# Altium PCB PRO_PCB_DESIGN.PcbDoc
Units mm, origin at the board's own origin, x right, y up, seen from the top; angles counter-clockwise.
Board outline 20 x 20 mm, 2 copper layers (Top Layer, Bottom Layer), stack 1.671 mm thick; 4 components, 3 nets, 10 pads, 2 vias.
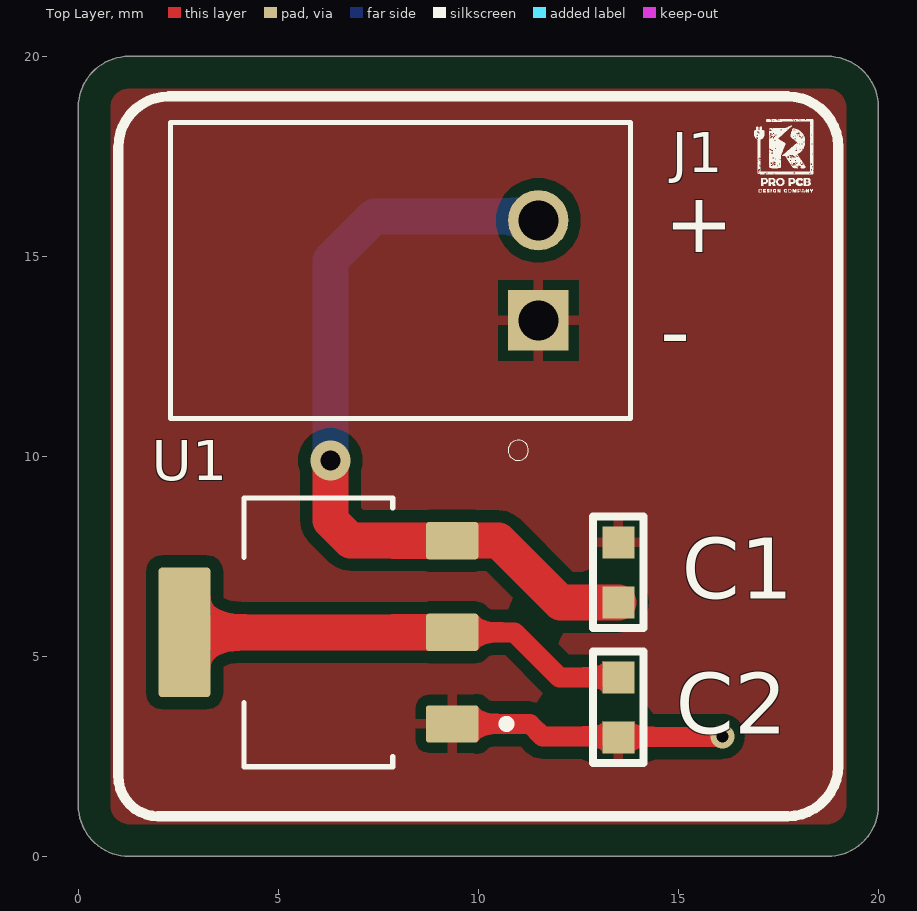
[diagram p0: Top Layer view]
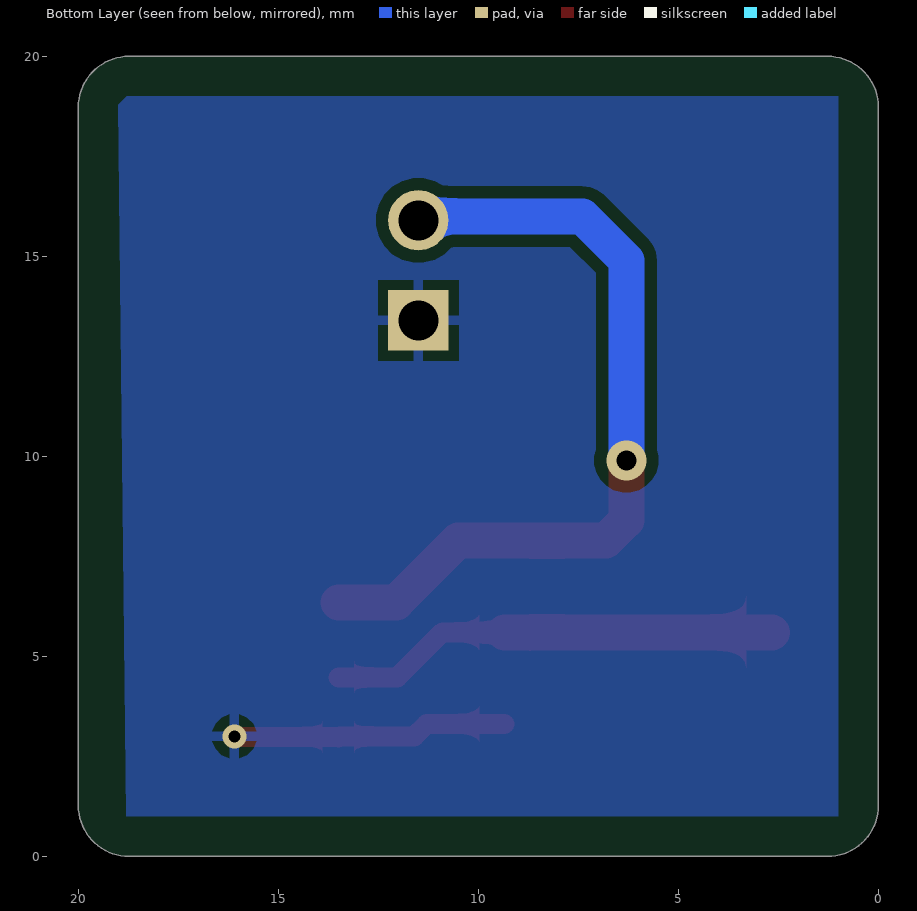
[diagram p1: Bottom Layer view, seen from below]
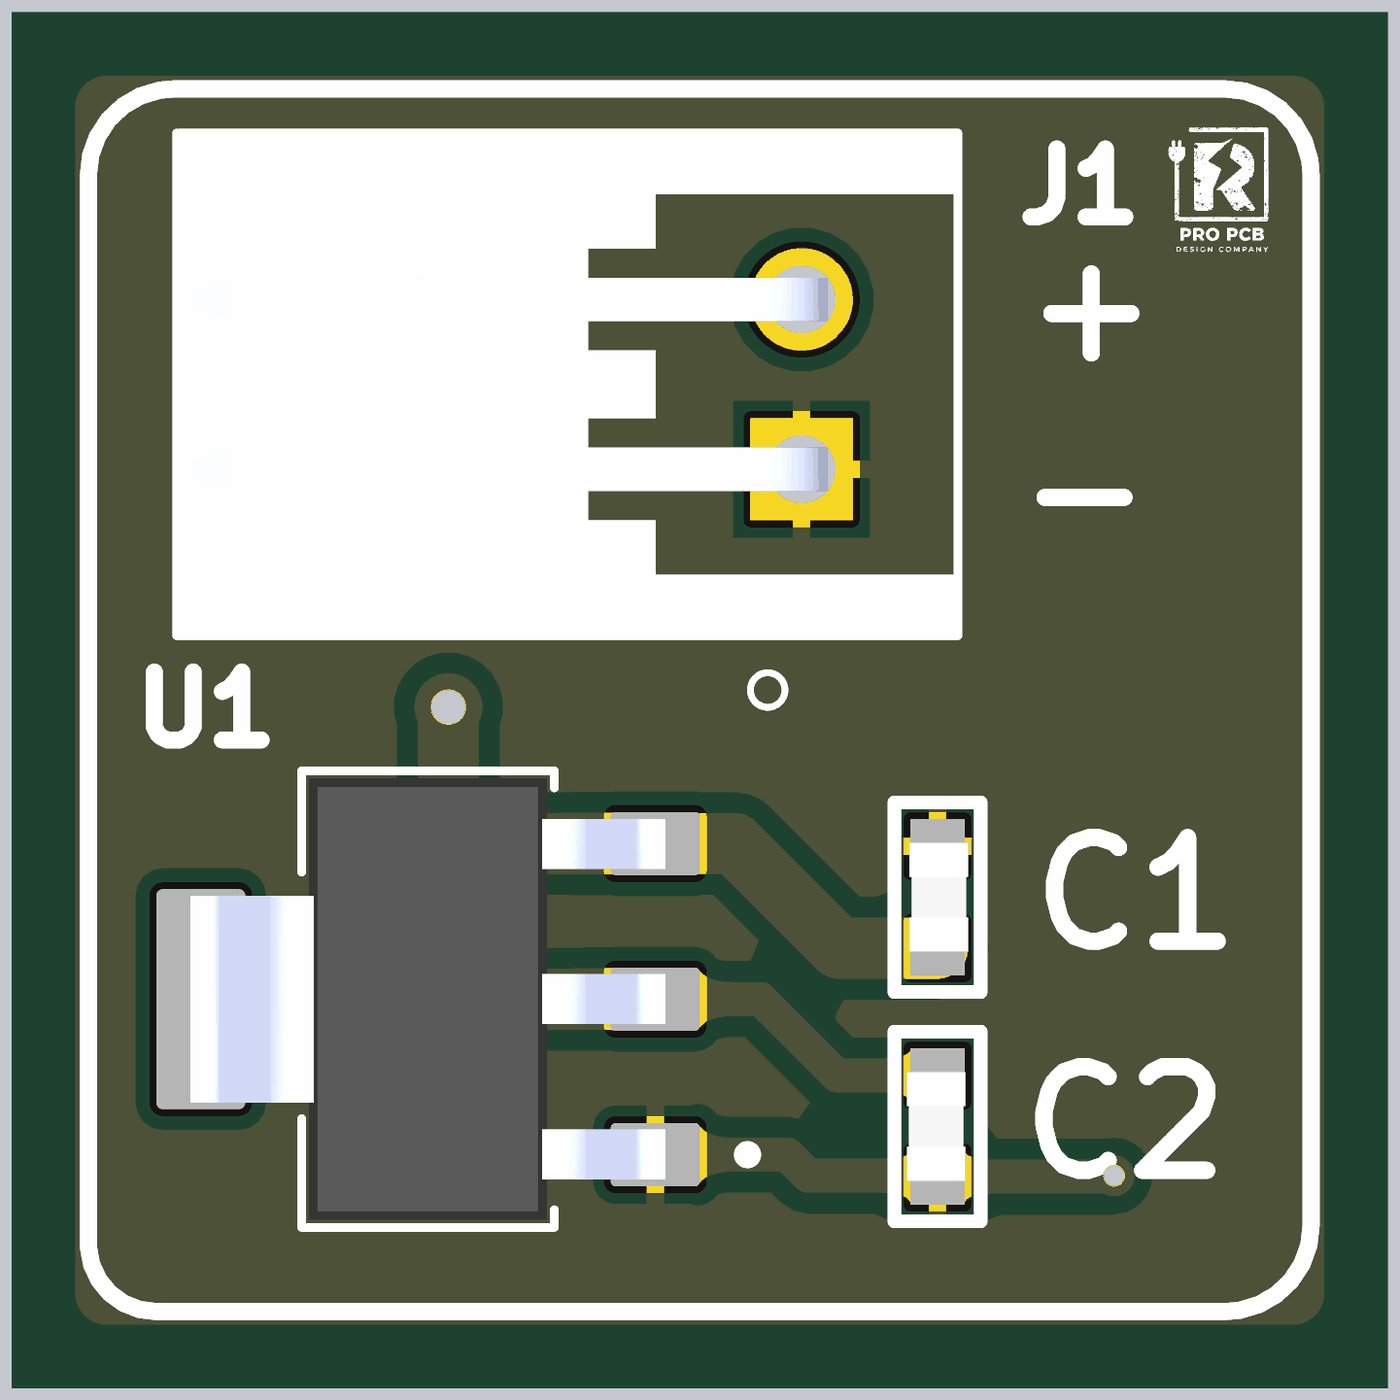
[diagram p2: 3D render of the assembled board from above, using the file's embedded part models]

## Layer stack, top to bottom
Top Solder: solder mask 0.0102, Solder Resist, Dk 3.5
Top Layer: signal copper 0.0356
Dielectric 1: dielectric 1.6, FR-4, Dk 4.8
Bottom Layer: signal copper 0.0356
Bottom Solder: solder mask 0.0102, Solder Resist, Dk 3.5

## Board outline
0,1.27 0,18.73 cw(c1.27,18.73) 1.27,20 18.73,20 cw(c18.73,18.73) 20,18.73 20,1.27 cw(c18.73,1.27) 18.73,0 1.27,0 cw(c1.27,1.27)

## Design rules (kind name [scope] priority, off if disabled: settings)
BoardOutlineClearance [All] p1: gap=0.8 ignorepadtopadclearanceinfootprint=FALSE
Clearance [All] p1: gap=0.3 ignorepadtopadclearanceinfootprint=FALSE
PolygonConnect [All] p1: connectstyle=Relief reliefconductorwidth=0.254 reliefentries=4 polygonreliefangle="90 Angle" airgapwidth=0.254
RoutingVias [All] p1: holewidth=0.3 width=0.6 viastyle="Through Hole" minholewidth=0.3 minwidth=0.6 maxholewidth=0.5 maxwidth=1
SilkToSolderMaskClearance [IsPad] p1: minsilkscreentomaskgap=0.1 clearancetoexposedcopper=TRUE
SolderMaskExpansion [All] p1: expansion=0.102 istentingtop=FALSE
SupplyNets "Schematic Supply Nets" [InNet('GND')] p1: voltage=0.000
Width [All] p1: maxlimit=1 minlimit=0.3 preferedwidth=0.5
29 further rules are at their usual default settings.

## Components (designator, comment, footprint, x,y, rotation, side; value= is the part's Value field where it differs from the comment)
C1 "Cap_0402" Capacitor_0603 13.5,7.1 r270 top
C2 "Cap_0402" Capacitor_0603 13.5,3.725 r90 top
J1 "XH_2 pin" JST_S2B-XH-A(LF)(SN) 11.5,14.65 r90 top
U1 "AMS1117" SOT229P700X180-4N 6,5.6 r180 top

## Footprints (in the part's own frame and the unit in brackets; to place one, negate y for a bottom-side part, rotate by r counter-clockwise, add the part's x,y. Pads: shape width x height; smd on the part's side, far side on the other; paste and mask are expansions set on the pad)
Capacitor_0603 [mm]
  rect 0.8x0.8 smd: 1(-0.75,0) 2(0.75,0)
  silkscreen extent -1.4,-0.64 1.4,0.64, body extent -0.8,-0.41 0.8,0.45, height 0.87
JST_S2B-XH-A(LF)(SN) [mm]
  rect 1.508x1.508 / inner round 1.508 / far side rect 1.508x1.508 hole 1: 1(-1.25,0)
  round 1.508 hole 1: 2(1.25,0)
  silkscreen extent -4.75,-2.3 3.7,9.2, body extent -3.7,-2.36 3.7,9.14, height 6.1
SOT229P700X180-4N [mm]
  rrect15% 1.31x0.93 smd: 1(-3.345,2.29) 2(-3.345,0) 3(-3.345,-2.29)
  rrect15% 1.31x3.24 smd: 4(3.345,0)
  silkscreen extent -4.8,-3.36 1.86,3.36, body extent -3.5,-3.25 3.5,3.25, height 1.8

## Part data
C1 C2: "0402", LatestRevisionDate=17-Jul-2002, LatestRevisionNote="Re-released for DXP Platform.", PackageDescription="Radial Cap, Thru-Hole; 2 Leads; 0.3 in Pin Spacing", PackageReference=RAD-0.3, Published=8-Jun-2000, Publisher="Altium Limited"
J1: library part "PHOENIX_2 pin", "2 Position Wire to Board Terminal Block Horizontal with Board 0.197 (5.00mm) Through Hole", Package=None, Availability="In Stock", Check_prices=https://www.snapeda.com/parts/1935161/Phoenix+Contact/view-part/?ref=eda, MF="Phoenix Contact", MP=1935161, Price=None, Purchase-URL=https://pricing.snapeda.com/search/part/1935161/?ref=eda, SnapEDA_Link=https://www.snapeda.com/parts/1935161/Phoenix+Contact/view-part/?ref=snap
U1: "1A LOW DROPOUT VOLTAGE REGULATOR SOT-223", Package="SOT-223 Seeed Technology", Availability="Not in stock", Check_prices=https://www.snapeda.com/parts/AMS1117/Advanced+Monolithic+Systems/view-part/?ref=eda, MF="Advanced Monolithic Systems", MP=AMS1117, Price=None, SnapEDA_Link=https://www.snapeda.com/parts/AMS1117/Advanced+Monolithic+Systems/view-part/?ref=snap

## Via types
v1: diameter 0.6, hole 0.3, Top Layer to Bottom Layer, tented both sides, 1 vias
v2: diameter 1, hole 0.5, Top Layer to Bottom Layer, tented both sides, 1 vias

## Nets (pads, with @x,y where several pads share a name; then routed paths per layer and width w, separated by ;. In a path a pad name is that pad's centre, name@x,y a point inside that pad or via, vN(x,y) a via of type N, cw(c..) or ccw(c..) an arc to the next point about the centre after c; other vN are vias at no path point)
3V3: C2.2 U1.2 U1.4 | length 11.3
  Top Layer w0.5: U1.2 10.9,5.6 12.025,4.475 C2.2
  Top Layer w0.9: U1.4 U1.2
GND: C1.1 C2.1 J1.1 U1.1 | length 6.9
  Top Layer w0.5: U1.1 11.29,3.31 11.6,3 13.475,3 C2.1 13.512,2.988 16.088,2.988 v1(16.1,3)
NetC1_2: C1.2 J1.2 U1.3 | length 20.2
  Top Layer w0.9: v2(6.3,9.9) 6.3,8.4 6.81,7.89 U1.3 10.51,7.89 12.05,6.35 C1.2
  Bottom Layer w0.9: v2(6.3,9.9) 6.3,14.9 7.4,16 11.4,16 J1.2

## Polygon pours and split planes (outlines as drawn)
GND on Top Layer "GND_L01_P001" (solid, remove dead copper, pour order 1): 0,1.27 0,18.73 cw(c1.27,18.73) 1.27,20 18.73,20 cw(c18.73,18.73) 20,18.73 20,1.27 cw(c18.73,1.27) 18.73,0 1.27,0 cw(c1.27,1.27)
GND on Bottom Layer "GND_L02_P000" (solid, pour order 0): 19,19 1,19 1,1 18.8,1

## Silkscreen, mask and mechanical layers (free items; w line width, h text height)
Top Overlay:
  drawing of 33 lines, arcs and shapes, not listed
  text "+" at 14.654,15.1 h1.52
  text "-" at 14.554,12.392 h1.52
Board Outline:
  lines w0.254: 0,1.27 ccw(c1.27,1.27) 1.27,0 18.73,0 ccw(c18.73,1.27) 20,1.27 20,18.73 ccw(c18.73,18.73) 18.73,20 10,20 1.27,20 ccw(c1.27,18.73) 0,18.73 0,1.27